# Altium PCB Limit_Switch_Bottom_Horizontal_v1.0.PcbDoc
Units mm, origin at the board's own origin, x right, y up, seen from the top; angles counter-clockwise.
Board outline 32.6 x 15.1 mm, 2 copper layers (Top Layer, Bottom Layer), stack 1.569 mm thick; 9 components, 6 nets, 23 pads, 2 vias.
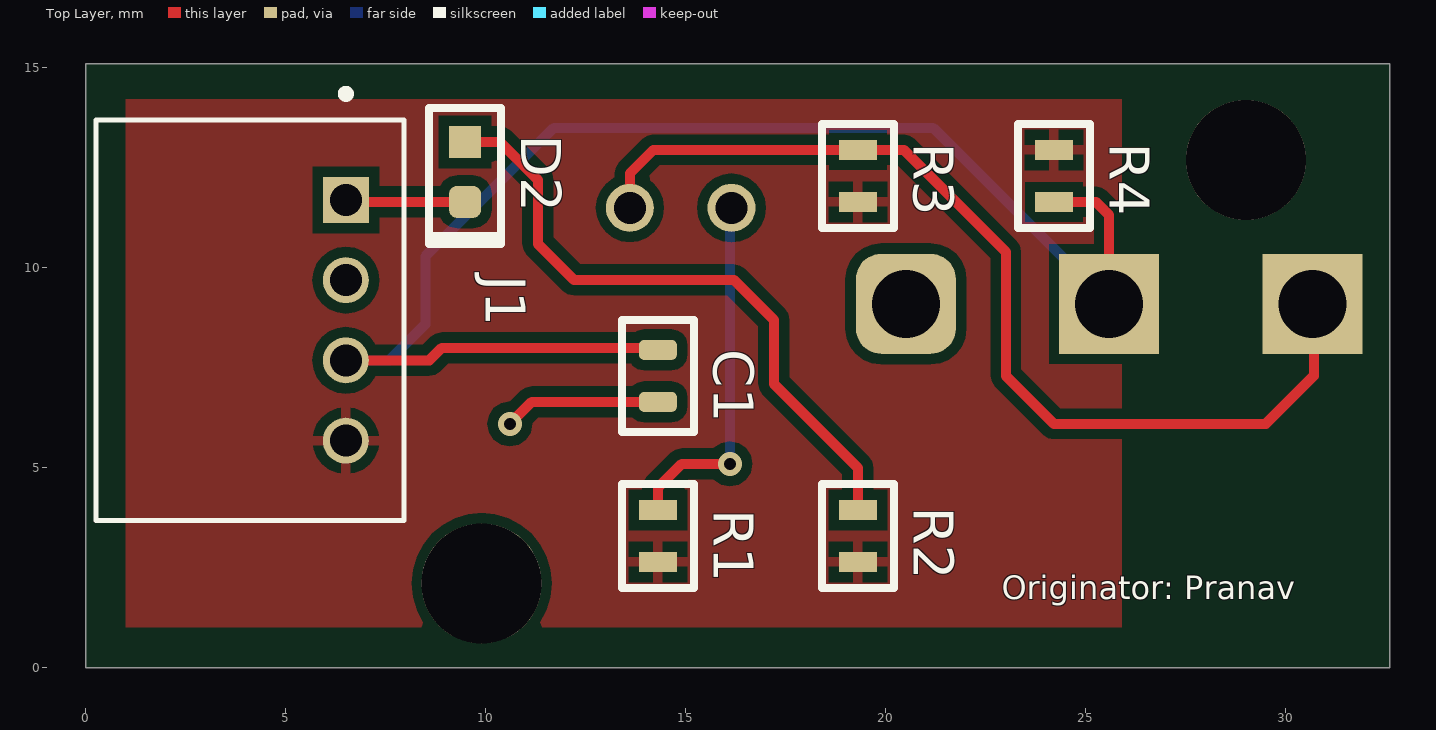
[diagram p0: Top Layer view]
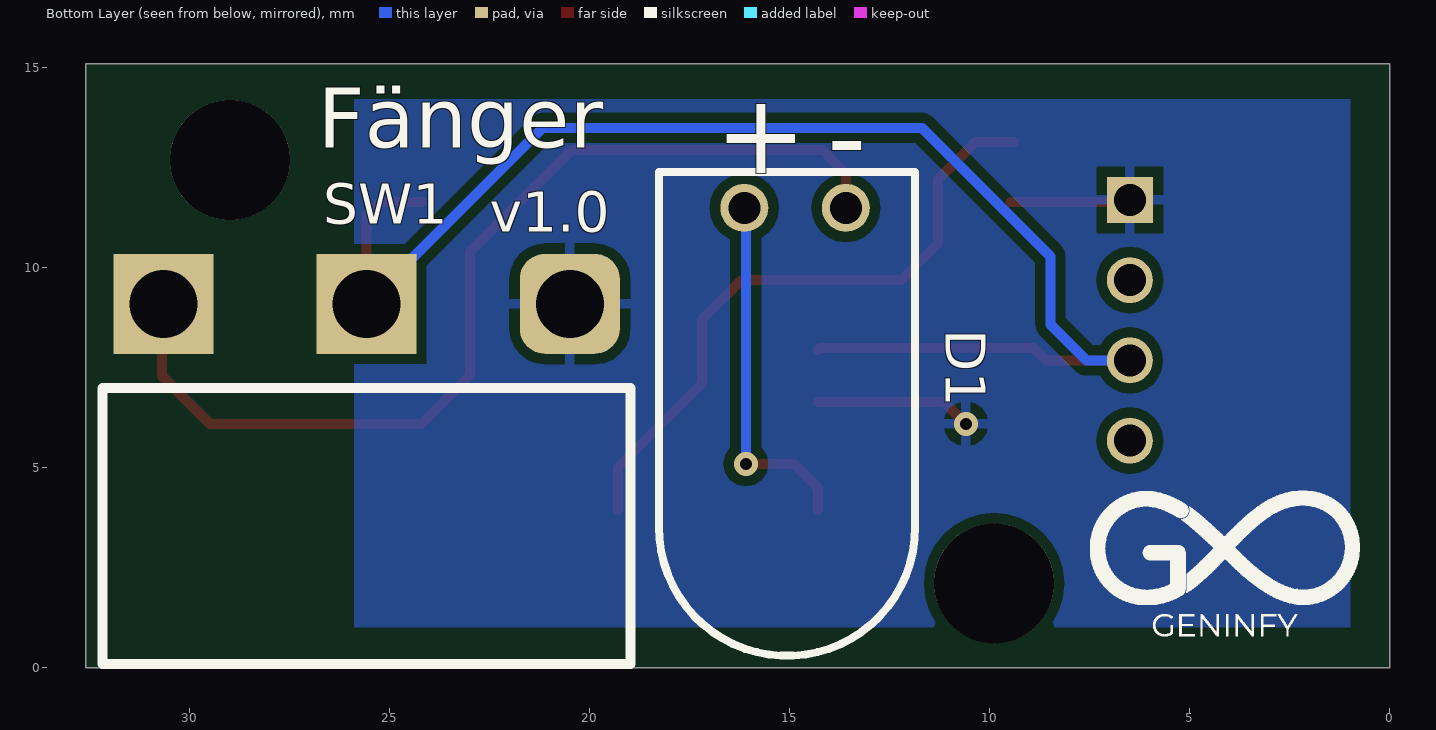
[diagram p1: Bottom Layer view, seen from below]
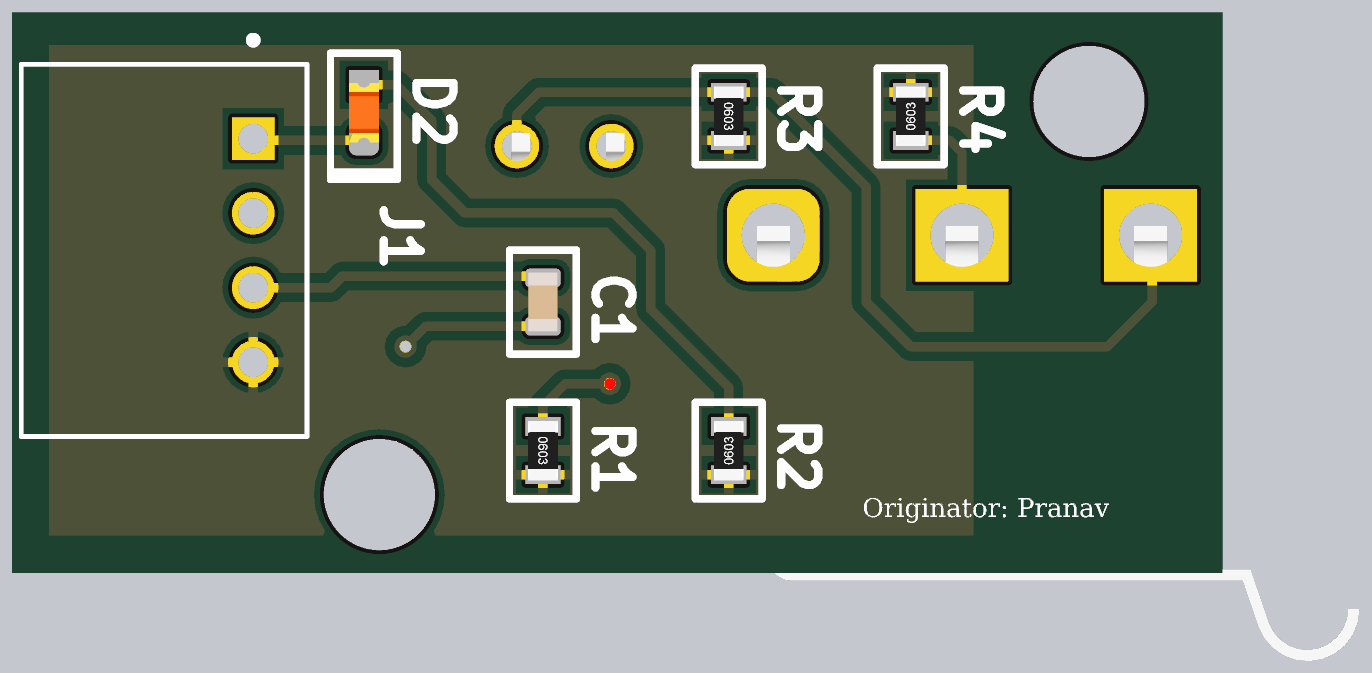
[diagram p2: 3D render of the assembled board from above, using the file's embedded part models]

## Layer stack, top to bottom
Top Solder: solder mask 0.0254, SM-001, Dk 4
Top Layer: signal copper 0.035
Dielectric 1: core 1.4986, Core-043, Dk 4.3
Bottom Layer: signal copper 0.035
Bottom Solder: solder mask 0.0254, SM-001, Dk 4

## Board outline
0,0 32.6,0 32.6,15.1 0,15.1

## Design rules (kind name [scope] priority, off if disabled: settings)
Clearance [All] p1: gap=0.254 ignorepadtopadclearanceinfootprint=FALSE except(0: Arc-Hole Track-Hole SMDPad-Hole THPad-Hole Via-Hole Fill-Hole Poly-Hole Region-Hole Text-Hole)
PolygonConnect [All] p1: connectstyle=Relief reliefconductorwidth=0.254 reliefentries=4 polygonreliefangle="90 Angle" airgapwidth=0.254
RoutingVias [All] p1: holewidth=0.711 width=1.27 viastyle="Through Hole" minholewidth=0.711 minwidth=1.27 maxholewidth=0.711 maxwidth=1.27
SolderMaskExpansion [All] p1: expansion=0.102 istentingtop=FALSE
Width [All] p1: maxlimit=0.254 minlimit=0.254 preferedwidth=0.254
30 further rules are at their usual default settings.

## Components (designator, comment, footprint, x,y, rotation, side; value= is the part's Value field where it differs from the comment)
C1 "0.1uF" "0.1uF 0603" 14.3,7.3 r90 top
D1 "LED - Red" "LED 5MM" 14.87,11.5 r180 bottom
D2 "LED - Orange" LED0603-Orange 9.479,12.4 r90 top
J1 "440055-4" TE_440055-4 6.5,11.7 r270 top
R1 "68R" "68R 0603" 14.3,3.3 r270 top
R2 "68R" "68R 0603" 19.3,3.3 r90 top
R3 "10k" "10k R0603" 19.3,12.3 r270 top
R4 "10k" "10k R0603" 24.2,12.3 r90 top
SW1 "Limit Switch" "LIM SW 1" 25.581,9.1 r270 bottom

## Footprints (in the part's own frame and the unit in brackets; to place one, negate y for a bottom-side part, rotate by r counter-clockwise, add the part's x,y. Pads: shape width x height; smd on the part's side, far side on the other; paste and mask are expansions set on the pad)
"0.1uF 0603" [mm]
  rrect50% 0.5x0.95 smd: 1(-0.65,0) 2(0.65,0)
  silkscreen extent -1.4,-0.9 1.4,0.9, body extent -0.8,-0.4 0.8,0.4, height 0.8
"10k R0603" [mm]
  rect 0.5x0.95 smd: 1(-0.65,0) 2(0.65,0)
  silkscreen extent -1.3,-0.9 1.3,0.9, body extent -0.8,-0.4 0.8,0.4, height 0.45
"68R 0603" [mm]
  rect 0.5x0.95 smd: 1(-0.65,0) 2(0.65,0)
  silkscreen extent -1.3,-0.9 1.3,0.9, body extent -0.8,-0.4 0.8,0.4, height 0.45
LED0603-Orange [mm]
  rrect50% 0.8x0.8 smd: 1(-0.75,0)
  rect 0.8x0.8 smd: 2(0.75,0)
  silkscreen extent -1.8,-0.9 1.6,1, body extent -0.8,-0.4 0.8,0.4, height 0.7
"LED 5MM" [mm]
  round 1.2 hole 0.8: A(-1.27,0) K(1.27,0)
  silkscreen extent -3.4,-11.2 3,0.9, body extent -3.1,-10.37 2.55,0.35, height 5
"LIM SW 1" [mm]
  rrect50% 2.5x2.5 hole 1.7: 1(0,5.08)
  rect 2.5x2.5 hole 1.7: 2(0,0) 3(0,-5.08)
  silkscreen extent 2.1,-6.6 9,6.6, body extent -0.25,-10.7 11.47,6.4, height 5.76
TE_440055-4 [mm]
  rect 1.15x1.15 hole 0.8: 1(0,0)
  round 1.15 hole 0.8: 2(2.007,0) 3(4.013,0) 4(6.02,0)
  silkscreen extent -2.75,-6.25 8.02,1.45

## Part data
C1: library part C0603C104M4RACTU, "CAP CER 0.1UF 16V X7R 0603", Capacitance=100nF, Case Code (Imperial)=0603, Case Code (Metric)=1608, Dielectric=X7R, Dielectric Material=Ceramic, Manufacturer=KEMET, Max Operating Temperature=125°C, Min Operating Temperature=-55°C, Package Quantity=1, Supplier Part Number 1=399-1099-1-ND, Tolerance=20%, Voltage Rating=16V, Case/Package=0603, Category="Ceramic Capacitors", ComponentLink1Description=https://datasheet.ciiva.com/18102/getdatasheetpartid-66190-18102310.pdf?src-supplier=Verical, ComponentLink1URL=https://datasheet.ciiva.com/18102/getdatasheetpartid-66190-18102310.pdf?src-supplier=Verical, ComponentLink2Description=https://datasheet.ciiva.com/7823/kem-c1002-x7r-smd-7823992.pdf?src-supplier=Element14, ComponentLink2URL=https://datasheet.ciiva.com/7823/kem-c1002-x7r-smd-7823992.pdf?src-supplier=Element14, ComponentLink3Description=https://datasheet.ciiva.com/7823/kem-c1002-x7r-smd-7823993.pdf?src-supplier=Element14, ComponentLink3URL=https://datasheet.ciiva.com/7823/kem-c1002-x7r-smd-7823993.pdf?src-supplier=Element14, ComponentLink4Description=https://datasheet.ciiva.com/14589/70095383-14589450.pdf?src-supplier=Allied+Electronics, ComponentLink4URL=https://datasheet.ciiva.com/14589/70095383-14589450.pdf?src-supplier=Allied+Electronics, ComponentLink5Description=https://datasheet.ciiva.com/18192/getdatasheetpartid-302288-18192716.pdf?src-supplier=Verical, ComponentLink5URL=https://datasheet.ciiva.com/18192/getdatasheetpartid-302288-18192716.pdf?src-supplier=Verical, Depth=0.8mm, Height=0.8mm, Lead Pitch=0.7mm, Length=1.6mm, Manufacturer Part Number=C0603C104M4RACTU, Mount="Surface Mount,PCB", Number of Pins=2, Packaging="Tape and Reel", Pricing 1="1=0.10000, 10=0.03100, 50=0.01720, 100=0.01400, 500=0.01002, 1000=0.00787 (USD)", Radiation Hardening=No, REACH SVHC="No SVHC", RoHS=Yes, Stock 1=114153, Supplier 1=Digi-Key, Termination=SMD/SMT, Thickness=0.034inch, Voltage Rating (DC)=16V, Width=0.031inch
D1: library part C5SMF-RJF-CT0W0BB2, "LED RED CLEAR 5MM OVAL T/H", Case/Package=Radial, Color=Red, Forward Current=20mA, Forward Voltage=2.1V, Manufacturer=Cree, Max Operating Temperature=95°C, Min Operating Temperature=-40°C, Package Quantity=2500, Supplier Part Number 1=C5SMF-RJF-CT0W0BB2CT-ND, Category=LEDs, ComponentLink1Description=https://datasheet.ciiva.com/29561/c5smfrjfrjegjfgjebjfbje1240-29561925.pdf?src-supplier=Digi-Key, ComponentLink1URL=https://datasheet.ciiva.com/29561/c5smfrjfrjegjfgjebjfbje1240-29561925.pdf?src-supplier=Digi-Key, Dominant Wavelength=621nm, Height=10.95mm, Illumination Color=Red, Lens Color=Red, Lens Style=Elliptical, Lens Transparency=Clear, Luminous Intensity=2640mcd, Manufacturer Part Number=C5SMF-RJF-CT0W0BB2, Mount="Through Hole", Packaging="Tape and Reel", Pricing 1="1=0.14000, 10=0.13200, 100=0.12160, 1000=0.10877 (USD)", RoHS=Yes, Stock 1=32149, Supplier 1=Digi-Key, Test Current=20mA, Viewing Angle=40°
D2: library part LTST-C191KFKT, "LED ORANGE CLEAR SMD", Case Code (Imperial)=0603, Case Code (Metric)=1608, Color=Orange, Forward Current=30mA, Forward Voltage=2V, Lens Color=Colorless, Manufacturer="Vishay Lite-On", Max Operating Temperature=85°C, Min Operating Temperature=-55°C, Package Quantity=1, Power Dissipation=75mW, Reverse Voltage=5V, Supplier Part Number 1=160-1445-1-ND, Test Current=20mA, Case/Package=0603, Category=LEDs, ComponentLink1Description=https://datasheet.ciiva.com/2109/ltst-c191kfkt-2109968.pdf?src-supplier=Digi-Key, ComponentLink1URL=https://datasheet.ciiva.com/2109/ltst-c191kfkt-2109968.pdf?src-supplier=Digi-Key, ComponentLink2Description=https://datasheet.ciiva.com/12400/100-ltst-c191kfkt-39904-12400811.pdf?src-supplier=Mouser, ComponentLink2URL=https://datasheet.ciiva.com/12400/100-ltst-c191kfkt-39904-12400811.pdf?src-supplier=Mouser, ComponentLink3Description=https://datasheet.ciiva.com/11775/0900766b80dc02b0-11775613.pdf?src-supplier=RSComponents, ComponentLink3URL=https://datasheet.ciiva.com/11775/0900766b80dc02b0-11775613.pdf?src-supplier=RSComponents, ComponentLink4Description=https://datasheet.ciiva.com/15201/getdatasheetpartid-631075-15201391.pdf?src-supplier=Verical, ComponentLink4URL=https://datasheet.ciiva.com/15201/getdatasheetpartid-631075-15201391.pdf?src-supplier=Verical, ComponentLink5Description=https://datasheet.ciiva.com/2109/s-110-ltst-c191kfkt-2109969.pdf?src-supplier=Digi-Key, ComponentLink5URL=https://datasheet.ciiva.com/2109/s-110-ltst-c191kfkt-2109969.pdf?src-supplier=Digi-Key, Depth=0.8mm, Dominant Wavelength=605nm, Height=0.55mm, Illumination Color=Orange, Lead Free="Lead Free", Length=1.6mm, Lens Style=Diffused,Colorless,Rectangular, Lens Transparency=Clear, Luminous Intensity=90mcd, Manufacturer Part Number=LTST-C191KFKT, Mount="Surface Mount", Number of Elements=1, Number of LEDs=1, Number of Pins=2, Packaging="Tape and Reel", Power Rating=75mW, Pricing 1="1=0.24000, 10=0.17900, 100=0.08460, 500=0.05640, 1000=0.04418, 2500=0.04324 (USD)", Radiation Hardening=No, RoHS=Yes, Stock 1=92562, Supplier 1=Digi-Key, Viewing Angle=130°, Wavelength=611nm, Width=0.8mm
J1: "2.0MM,HDR,4POS,R/A", Package=None, Availability=Unavailable, Centerline_Pitch="2 mm[.079 in]", DigiKey-Purchase-URL=https://snapeda.com/shop?store=DigiKey&id=2374829, EU_RoHS_Compliance=Compliant, MF="TE Connectivity", Mouser-Purchase-URL=https://snapeda.com/shop?store=Mouser&id=2374829, MP=440055-4, Number_of_Positions=4, Price=None, Product_Type=Connector, SnapEDA_Link=https://www.snapeda.com/parts/440055-4/TE%20Connectivity%20AMP%20Connectors/view-part/2374829/?ref=snap
R1 R2: library part CRGP0603F68R, "CRGP 0603 68R 1%", Case Code (Imperial)=0603, Case Code (Metric)=1608, Manufacturer="TE Connectivity", Max Operating Temperature=155°C, Max Power Dissipation=250mW, Min Operating Temperature=-55°C, Resistor Type="Thick Film", Supplier Part Number 1=A130402CT-ND, Temperature Coefficient=200ppm/°C, Tolerance=1%, Case/Package=0603, Category="Chip SMD Resistors", ComponentLink1Description=https://www.te.com/commerce/DocumentDelivery/DDEController?Action=srchrtrv&amp;DocNm=9-1773463-9&amp;DocType=DS&amp;DocLang=English&src-supplier=Digi-Key, ComponentLink1URL=https://www.te.com/commerce/DocumentDelivery/DDEController?Action=srchrtrv&amp;DocNm=9-1773463-9&amp;DocType=DS&amp;DocLang=English&src-supplier=Digi-Key, Manufacturer Part Number=CRGP0603F68R, Number of Terminations=2, Packaging="Tape and Reel", Pricing 1="1=0.14000, 10=0.11400, 100=0.04470, 1000=0.01870, 2500=0.01714 (USD)", Resistance=68R, RoHS=No, Stock 1=49308, Supplier 1=Digi-Key
R3 R4: library part CRG0603F10K/10, "RES 10.0K OHM 1/10W 1% 0603", Case Code (Imperial)=0603, Manufacturer="TE Connectivity", Max Operating Temperature=125°C, Max Power Dissipation=100mW, Min Operating Temperature=-55°C, Number of Resistors=1, Package Quantity=10000, Resistance=10kR, Resistor Type="Thick Film", Supplier Part Number 1=A121523CT-ND, Temperature Coefficient=100ppm/°C, Tolerance=1%, Voltage Rating=50V, Case/Package=0603, Category="Chip SMD Resistors", ComponentLink1Description=https://datasheet.ciiva.com/2530/eng-cd-1622829-ba-2530062.pdf?src-supplier=Digi-Key, ComponentLink1URL=https://datasheet.ciiva.com/2530/eng-cd-1622829-ba-2530062.pdf?src-supplier=Digi-Key, Depth=0.8mm, ELV=Compliant, Height=0.022inch, Length=1.6mm, Manufacturer Part Number=CRG0603F10K/10, Military Standard=Not, Mount="Surface Mount", Number of Terminations=2, Packaging="Tape and Reel", Power Rating=100mW, Pricing 1="1=0.10000, 10=0.03100, 100=0.01270, 1000=0.00570, 2500=0.00494, 5000=0.00409 (USD)", Radiation Hardening=No, RoHS=Yes, Stock 1=172089, Supplier 1=Digi-Key, Termination=Solder, Weight=7.1E-05oz, Width=0.8mm
SW1: library part SS075Q102F035V2A, "SWITCH SNAP ACT SPDT 100MA 125V", Current Rating=100mA, Manufacturer=E-Switch, Max Operating Temperature=75°C, Min Operating Temperature=-25°C, Operating Position=0.425inch, Package Quantity=120, Supplier Part Number 1=EG4929-ND, Voltage Rating (AC)=125V, Category="Snap Action / Limit Switches", ComponentLink1Description=https://datasheet.ciiva.com/2892/q971024-2892235.pdf?src-supplier=Digi-Key, ComponentLink1URL=https://datasheet.ciiva.com/2892/q971024-2892235.pdf?src-supplier=Digi-Key, Electrical Life=100000Cycles, Manufacturer Part Number=SS075Q102F035V2A, Mechanical Life=1000000Cycles, Mount="Through Hole", Packaging=Bulk, Pretravel=0.08inch, Pricing 1="1=1.18000, 10=1.11800, 25=1.07280, 50=1.02820, 100=0.98340, 250=0.78224, 500=0.71520, 1000=0.69285, 5000=0.62580 (USD)", RoHS=Yes, Stock 1=5246, Supplier 1=Digi-Key, Switch Function=On-Mom, Termination="PC Pin", Throw Configuration=SPDT

## Free pads (board coordinates)
  round 3 hole 3 unplated: ""(9.895,2.115) ""(29,12.7)

## Via types
v1: diameter 0.6, hole 0.3, Top Layer to Bottom Layer, tented both sides, 2 vias

## Nets (pads, with @x,y where several pads share a name; then routed paths per layer and width w, separated by ;. In a path a pad name is that pad's centre, name@x,y a point inside that pad or via, vN(x,y) a via of type N, cw(c..) or ccw(c..) an arc to the next point about the centre after c; other vN are vias at no path point)
+3V3: J1.4 R1.2 R2.1 R3.2 R4.2
GND: C1.1 D2.1 J1.1 SW1.1 | length 6.9
  Top Layer w0.254: J1.1 6.55,11.65 D2.1 ; v1(10.6,6.1) 11.15,6.65 C1.1
LM_SW: C1.2 J1.3 R4.1 SW1.2 | length 36
  Top Layer w0.254: J1.3 8.587,7.687 8.9,8 14.25,8 C1.2 ; R4.1 25.25,11.65 25.581,11.319 SW1.2
  Bottom Layer w0.254: J1.3 7.587,7.687 8.487,8.587 8.487,10.287 11.7,13.5 21.181,13.5 SW1.2
NetD1_A: D1.A R1.1 | length 9.1
  Top Layer w0.254: R1.1 14.3,4.5 14.9,5.1 v1(16.1,5.1)
  Top Layer w0.3: D1.A D1.A@16.2,11.44
  Bottom Layer w0.254: v1(16.1,5.1) 16.1,11.46 D1.A
NetD1_K: D1.K R3.1 SW1.3 | length 25.2
  Top Layer w0.254: D1.K 13.6,12.361 14.189,12.95 R3.1 20.45,12.95 23,10.4 23,7.3 24.2,6.1 29.5,6.1 30.7,7.3 30.7,9.061 SW1.3
NetD2_2: D2.2 R2.2 | length 16.2
  Top Layer w0.254: D2.2@9.4,13.15 10.35,13.15 11.3,12.2 11.3,10.6 12.2,9.7 16.2,9.7 17.2,8.7 17.2,7.1 19.3,5 R2.2
pads on no net: J1.2

## Polygon pours and split planes (outlines as drawn)
+3V3 on Top Layer "+3V3_L01_P002" (solid, pour order 2): 0.995,1.015 25.895,1.015 25.895,14.215 0.995,14.215
GND on Bottom Layer "GND_L02_P003" (solid, pour order 3): 0.995,1.015 25.895,1.015 25.895,14.215 0.995,14.215

## Silkscreen, mask and mechanical layers (free items; w line width, h text height)
Top Overlay:
  text "Originator: Pranav" at 22.9,1.511 h1
Bottom Overlay:
  drawing of 9 lines, arcs and shapes, not listed
  text "Fänger" at 26.8,13 h1.5
  text "v1.0" at 22.5,10.9 h1

## Text inside footprints (layer, text, board x,y; h text height)
D1: Bottom Overlay "-" at 14.07,12.3 h2; Bottom Overlay "+" at 16.87,12.367 h2; Bottom Assembly "-" at 14.07,12.3 h2; Bottom Assembly "+" at 16.87,12.367 h2